# EAGLE board SparkFun RTK Facet - Cellular (EAGLE 9.6.2)
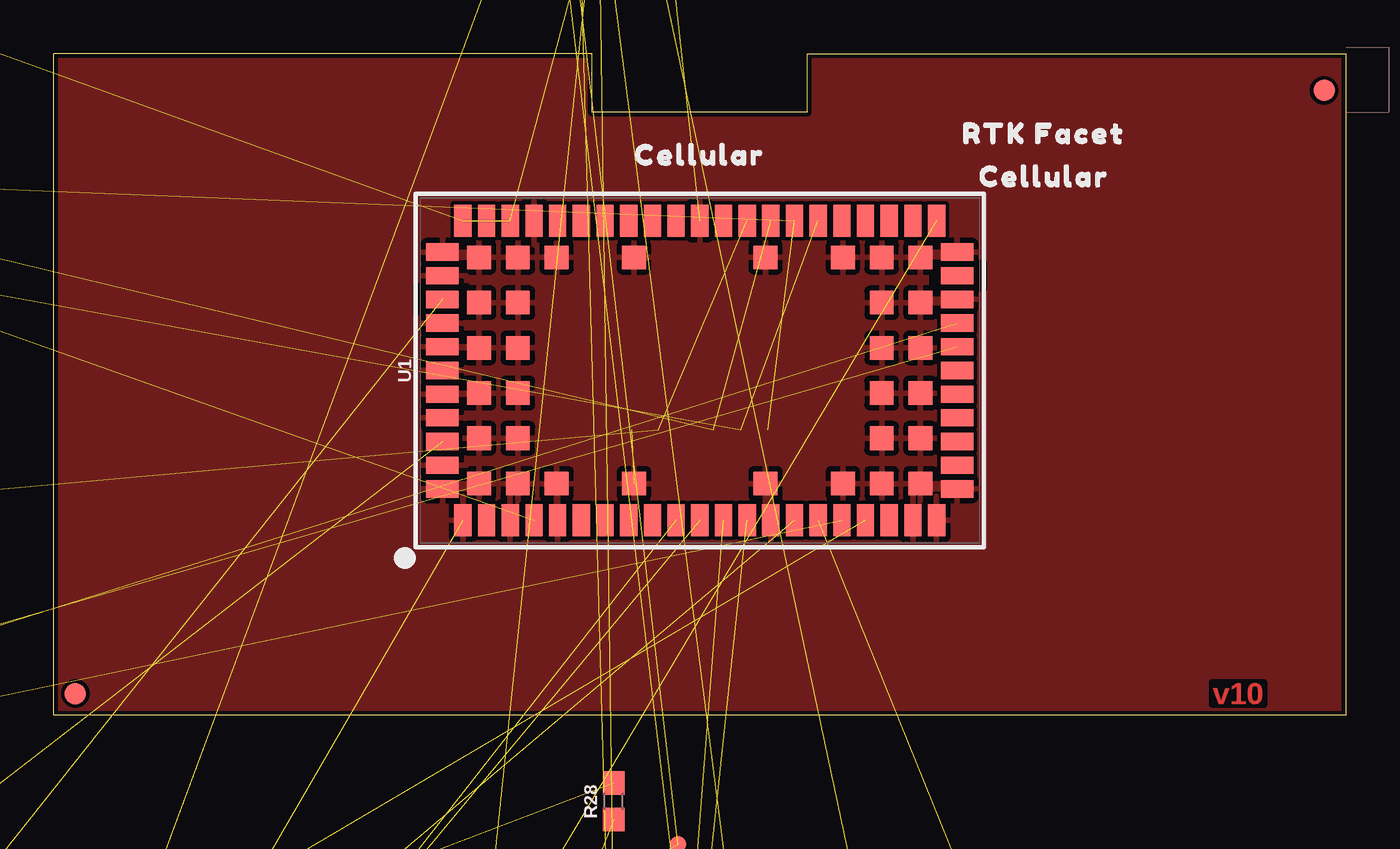
[diagram p0: board, top side]
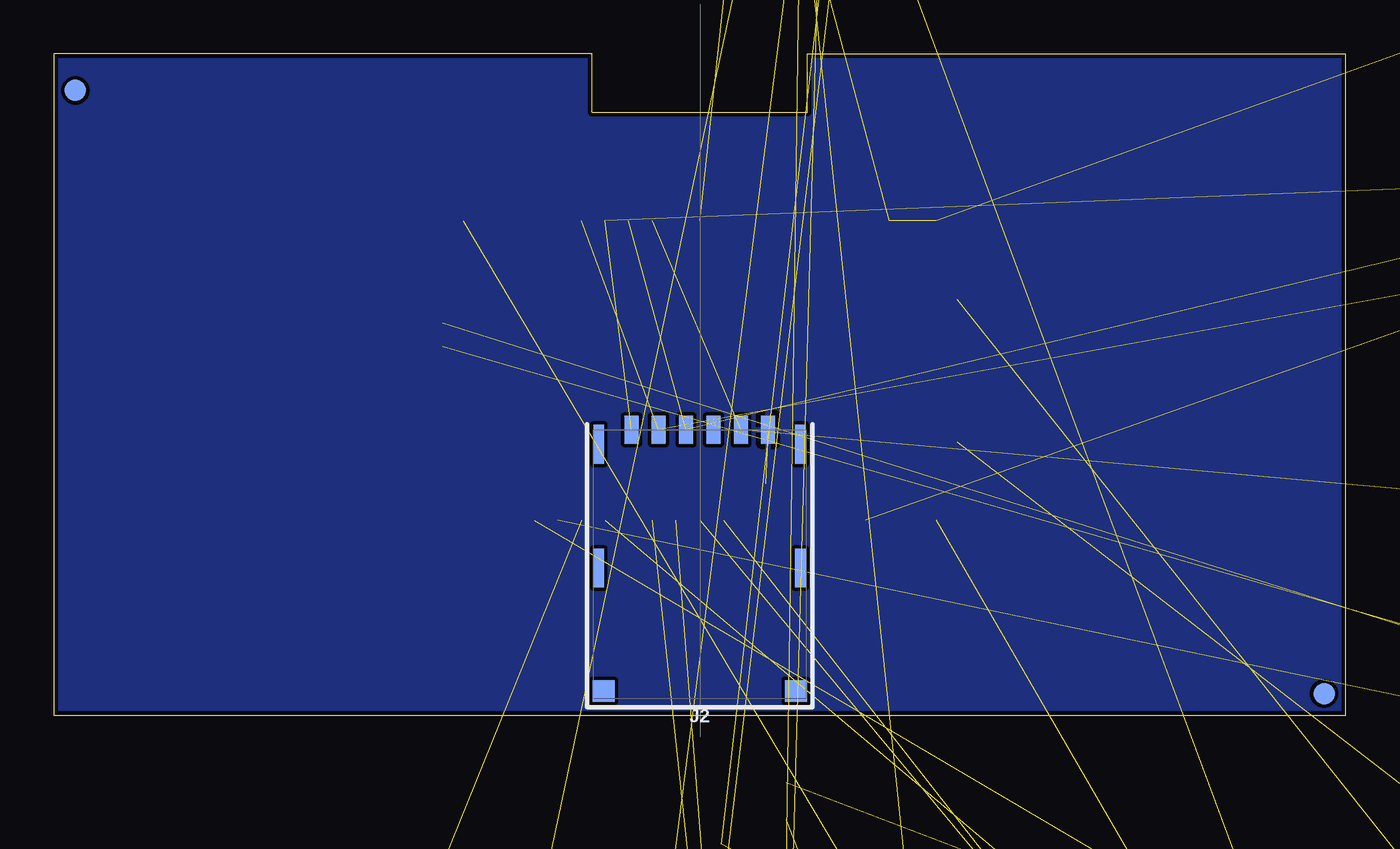
[diagram p1: board, bottom side, seen from below]

Size 60 x 30.7 mm. Coordinates in mm from the lower left corner, seen from the top.
Outline: 0,0 0,30.7 25,30.7 25,28 35,28 35,30.7 60,30.7 60,0 0,0
Copper layers (1*16): Top 0.035mm / dielectric 1.5mm / Bottom 0.035mm
Design rules "SparkFun-2-layer-TIGHT": minimum track width 7mil, minimum drill 15mil, track to track 7mil, track to pad 7mil, pad to pad 7mil, via to via 7mil, smd to smd 7mil, copper to edge 7mil, drill to drill 7mil, minimum pad ring 7mil, minimum via ring 7mil, stop-mask expansion 4mil, vias tented up to drill 25mil, thermal gap 10mil
Net classes: 0 default: width 0 mm, drill 0 mm; 1 power: width 0.178 mm
tKeepout: area 57,0 to 60,31; area 0,0 to 3,32
bKeepout: area 57,0 to 60,31; area 0,0 to 3,32

## Footprints (pad centres in the part's own frame; a part is rotated, then mirrored left to right if it is on the bottom)
0603 = smd 1.1 x 1: 1 -0.85,0; 2 0.85,0
0402 = smd 0.85 x 0.9: 1 -0.58,0; 2 0.58,0
SOT23-6L = smd 0.6 x 1.2: 1 -0.95,-1.15; 2 0,-1.15; 3 0.95,-1.15; 4 0.95,1.15; 5 0,1.15; 6 -0.95,1.15
LED-0603 = smd 1 x 1: A -0.877,0; C 0.877,0
FIDUCIAL-1X2 = smd 1 x 1: 1 0,0
SOP65P640X120-16N = smd 1.5 x 0.45: 1 -2.9,2.275; 2 -2.9,1.625; 3 -2.9,0.975; 4 -2.9,0.325; 5 -2.9,-0.325; 6 -2.9,-0.975; 7 -2.9,-1.625; 8 -2.9,-2.275; 9 2.9,-2.275; 10 2.9,-1.625; 11 2.9,-0.975; 12 2.9,-0.325; 13 2.9,0.325; 14 2.9,0.975; 15 2.9,1.625; 16 2.9,2.275
FPC_12_DOUBLESIDED_BACKFLIP = smd 0.3 x 0.8: 1 -2.75,1.35; 2 -2.25,1.35; 3 -1.75,1.35; 4 -1.25,1.35; 5 -0.75,1.35; 6 -0.25,1.35; 7 0.25,1.35; 8 0.75,1.35; 9 1.25,1.35; 10 1.75,1.35; 11 2.25,1.35; 12 2.75,1.35 | smd 0.4 x 0.8: MP1 -3.75,-1.15; MP2 3.75,-1.15
NANO_SIM_WURTH_693043020611 = smd 0.65 x 1.3: C1 1.905,6.25; C2 -0.635,6.25; C3 -1.905,6.25; C5 3.175,6.25; C6 0.635,6.25; C7 -3.175,6.25 | smd 0.48 x 1.8: MNT1 -4.69,5.58; MNT2 4.66,5.58; MNT3 -4.69,-0.17; MNT4 4.66,-0.17 | smd 1.03 x 1: MNT5 -4.465,-5.89; MNT6 4.465,-5.89
U.FL = smd 2.2 x 0.85: 1 0,1.375; 2 0,-1.375 | smd 1.05 x 1: FEED 1.525,0; NC -1.525,0
1X05_NO_SILK = drill 1.016 pad 1.88: 1 0,0; 2 2.54,0; 3 5.08,0; 4 7.62,0; 5 10.16,0
1X04_NO_SILK = drill 1.016 pad 1.88: 1 0,0; 2 2.54,0; 3 5.08,0; 4 7.62,0
SMT-JUMPER_3_1-NC_TRACE_SILK = smd 0.66 x 1.27: 1 -1.041,0; 2 0,0; 3 1.041,0
0402_COILCRAFT = smd 0.356 x 0.66: P$1 -0.432,0; P$2 0.432,0
SOT323 = smd 0.7 x 0.7: 1 -0.65,-0.925; 2 0.65,-0.925; 3 0,0.925
SOT-416FL = smd 0.46 x 0.65: 1 -0.5,-1.1; 2 0.5,-1.1; 3 0,0.05
PAD.03X.03 = smd 0.762 x 0.762: P$1 0,0
SARA-LGA = smd 0.8 x 1.5: 1 -11,-6.95; 2 -9.9,-6.95; 3 -8.8,-6.95; 4 -7.7,-6.95; 5 -6.6,-6.95; 6 -5.5,-6.95; 7 -4.4,-6.95; 8 -3.3,-6.95; 9 -2.2,-6.95; 10 -1.1,-6.95; 11 0,-6.95; 12 1.1,-6.95; 13 2.2,-6.95; 14 3.3,-6.95; 15 4.4,-6.95; 16 5.5,-6.95; 17 6.6,-6.95; 18 7.7,-6.95; 19 8.8,-6.95; 20 9.9,-6.95; 21 11,-6.95; 33 11,6.95; 34 9.9,6.95; 35 8.8,6.95; 36 7.7,6.95; 37 6.6,6.95; 38 5.5,6.95; 39 4.4,6.95; 40 3.3,6.95; 41 2.2,6.95; 42 1.1,6.95; 43 0,6.95; 44 -1.1,6.95; 45 -2.2,6.95; 46 -3.3,6.95; 47 -4.4,6.95; 48 -5.5,6.95; 49 -6.6,6.95; 50 -7.7,6.95; 51 -8.8,6.95; 52 -9.9,6.95; 53 -11,6.95 | smd 1.5 x 0.8: 22 11.95,-5.5; 23 11.95,-4.4; 24 11.95,-3.3; 25 11.95,-2.2; 26 11.95,-1.1; 27 11.95,0; 28 11.95,1.1; 29 11.95,2.2; 30 11.95,3.3; 31 11.95,4.4; 32 11.95,5.5; 54 -11.95,5.5; 55 -11.95,4.4; 56 -11.95,3.3; 57 -11.95,2.2; 58 -11.95,1.1; 59 -11.95,0; 60 -11.95,-1.1; 61 -11.95,-2.2; 62 -11.95,-3.3; 63 -11.95,-4.4; 64 -11.95,-5.5 | smd 1.1 x 1.1: 65 -10.25,-5.25; 66 -10.25,-3.15; 67 -10.25,-1.05; 68 -10.25,1.05; 69 -10.25,3.15; 70 -10.25,5.25; 71 -8.45,-5.25; 72 -8.45,-3.15; 73 -8.45,-1.05; 74 -8.45,1.05; 75 -8.45,3.15; 76 -8.45,5.25; 77 -6.65,-5.25; 78 -6.65,5.25; 79 -3.05,-5.25; 80 -3.05,5.25; 81 3.05,-5.25; 82 3.05,5.25; 83 6.65,-5.25; 84 6.65,5.25; 85 8.45,-5.25; 86 8.45,-3.15; 87 8.45,-1.05; 88 8.45,1.05; 89 8.45,3.15; 90 8.45,5.25; 91 10.25,-5.25; 92 10.25,-3.15; 93 10.25,-1.05; 94 10.25,1.05; 95 10.25,3.15; 96 10.25,5.25
SOT353 = smd 0.42 x 0.7: 1 -0.65,-0.95; 2 0,-0.95; 3 0.65,-0.95; 4 0.65,0.95; 5 -0.65,0.95

## Placement (x,y rotation side)
C7  47pF  [0603]  -32,9 0 top  (outside the outline)
C8  47pF  [0603]  -28,9 0 top  (outside the outline)
C10  47pF  [0603]  -24,9 0 top  (outside the outline)
C11  47pF  [0603]  -20,9 0 top  (outside the outline)
C12  0.1uF  [0603]  -32,5 0 top  (outside the outline)
C14  0.1uF  [0603]  -20,33 0 top  (outside the outline)
C15  68pF  [0603]  -16,33 0 top  (outside the outline)
C16  10uF  [0603]  -12,33 0 top  (outside the outline)
C18  33pF  [0402]  -14,-15 0 top  (outside the outline)
C19  27pF  [0402]  -11,-15 0 top  (outside the outline)
C22  0.1uF  [0603]  26,-32 90 top  (outside the outline)
C24  15pF  [0603]  -8,33 0 top  (outside the outline)
D8  DT1042-04SO-7  [SOT23-6L]  -20,24 0 top  (outside the outline)
D10  PESD0402  [0402]  -5,-7 0 top  (outside the outline)
D13  BLUE  [LED-0603]  61,-32 90 top  (outside the outline)
D14  WHITE  [LED-0603]  57,-20 90 top  (outside the outline)
FID1  FIDUCIAL1X2  [FIDUCIAL-1X2]  1,1 0 bottom
FID2  FIDUCIAL1X2  [FIDUCIAL-1X2]  59,29 0 bottom
FID3  FIDUCIAL1X2  [FIDUCIAL-1X2]  59,29 0 top
FID4  FIDUCIAL1X2  [FIDUCIAL-1X2]  1,1 0 top
FRAME1  FRAME-LETTER  [CREATIVE_COMMONS]  52.57,-29.5 0 bottom  (outside the outline)
FRAME2  FRAME-LETTERNO_PACKAGE  [DUMMY]  -7,-33 90 top  (outside the outline)
IC1  SN74AVC4T774PW  [SOP65P640X120-16N]  -1,-25 90 top  (outside the outline)
J1  [FPC_12_DOUBLESIDED_BACKFLIP]  25,45 180 top  (outside the outline)
J2  NANO_SIM  [NANO_SIM_WURTH_693043020611]  30,7 0 bottom
J3  U.FL  [U.FL]  -16,-20 0 top  (outside the outline)
J6  DIAG  [1X05_NO_SILK]  -32,1 0 top  (outside the outline)
J18  SARA_USB  [1X04_NO_SILK]  -31,-4 0 top  (outside the outline)
JP19  JUMPER-SMT_3_1-NC_TRACE_SILK  [SMT-JUMPER_3_1-NC_TRACE_SILK]  22,-10 90 top  (outside the outline)
L1  DNP  [0402_COILCRAFT]  -8,-14 0 top  (outside the outline)
L2  68nH  [0402_COILCRAFT]  -5,-14 0 top  (outside the outline)
LOGO3  OSHW-LOGOMINI  [OSHW-LOGO-MINI]  -10,6 0 top  (outside the outline)
LOGO5  SFE_LOGO_NAME_FLAME.1_INCH  [SFE_LOGO_NAME_FLAME_.1]  -13.9,12.9 0 top  (outside the outline)
Q2  310mA/60V/1.6Ω  [SOT323]  8,-14 90 top  (outside the outline)
Q3  310mA/60V/1.6Ω  [SOT323]  42,-26 90 top  (outside the outline)
Q4  310mA/60V/1.6Ω  [SOT323]  8,-9 90 top  (outside the outline)
Q5  20V/0.2A/8MHz/1.2Ω/1Vth  [SOT-416FL]  16,-21 90 top  (outside the outline)
Q7  310mA/60V/1.6Ω  [SOT323]  42,-21 90 top  (outside the outline)
R18  100k  [0603]  26,-24 90 top  (outside the outline)
R19  100k  [0603]  26,-20 90 top  (outside the outline)
R23  10k  [0603]  -17,-15 0 top  (outside the outline)
R27  1k  [0603]  26,-8 90 top  (outside the outline)
R28  1k  [0603]  26,-4 90 top  (outside the outline)
R29  2.2k  [0603]  30,-32 90 top  (outside the outline)
R30  2.2k  [0603]  30,-28 90 top  (outside the outline)
R31  0  [0603]  -32,28 0 top  (outside the outline)
R34  1k  [0603]  48,-21 90 top  (outside the outline)
R35  470  [0603]  53,-32 90 top  (outside the outline)
R39  100k  [0603]  53,-24 90 top  (outside the outline)
R42  1k  [0603]  53,-20 90 top  (outside the outline)
R43  1k  [0603]  57,-32 90 top  (outside the outline)
R44  100k  [0603]  57,-28 90 top  (outside the outline)
TP1  TEST-POINT3  [PAD.03X.03]  29,-21 90 top  (outside the outline)
TP2  TEST-POINT3  [PAD.03X.03]  29,-18 90 top  (outside the outline)
TP3  TEST-POINT3  [PAD.03X.03]  29,-15 90 top  (outside the outline)
TP4  TEST-POINT3  [PAD.03X.03]  29,-12 90 top  (outside the outline)
TP5  TEST-POINT3  [PAD.03X.03]  29,-9 90 top  (outside the outline)
TP6  TEST-POINT3  [PAD.03X.03]  29,-6 90 top  (outside the outline)
TP7  TEST-POINT3  [PAD.03X.03]  33,-33 90 top  (outside the outline)
TP8  TEST-POINT3  [PAD.03X.03]  33,-30 90 top  (outside the outline)
TP12  TEST-POINT3  [PAD.03X.03]  33,-21 90 top  (outside the outline)
TP13  TEST-POINT3  [PAD.03X.03]  60,-29 90 top  (outside the outline)
U1  SARA-R510M8S  [SARA-LGA]  30,16 0 top
U8  74HC1G04  [SOT353]  17,-31 90 top  (outside the outline)
U$2  [CELLULAR1]  46,25 0 top
U$13  [CELLULAR0]  30,26 0 top
U$14  [RTK_FACET0]  46,27 0 top
U$130  [NANO0]  72.19,7.54 0 top  (outside the outline)
U$131  [SIM0]  72.19,6.27 0 top  (outside the outline)

## Library data of the parts
C7 C8 C10 C11 = SparkFun-Capacitors; PROD_ID: CAP-08913
C12 C14 = SparkFun-Capacitors; PROD_ID: CAP-08604
C15 = SparkFun-Capacitors; PROD_ID: CAP-14092
C16 = SparkFun-Capacitors; PROD_ID: CAP-11015
C18 = New_Parts; DIGIKEY_PART: 490-5936-1-ND; MANUFACTURER: Murata; MANU_PART: GRM1555C1H330JA; PROD_ID: CAP-15358
C19 = New_Parts; DIGIKEY_PART: 490-11384-1-ND; MANUFACTURER: Murata; MANU_PART: GRM1555C1H270JA; PROD_ID: CAP-15357
C22 = SparkFun-Capacitors; PROD_ID: CAP-00810
C24 = SparkFun-Capacitors; PROD_ID: CAP-07881
D8 = ublox; PROD_ID: DIO-14095
D10 = New_Parts; DIGIKEY_PART: PESD0402-140CT-ND; MOUSE_PART: 650-PESD0402-140; PROD_ID: DIO-15359
D13 = SparkFun-LED; PROD_ID: DIO-08575
D14 = SparkFun-LED; PROD_ID: DIO-09004
FID1-FID4 FRAME1 LOGO3 LOGO5 = SparkFun-Aesthetics
FRAME2 = SparkFun-Aesthetics; DESIGNER: Nobody; VERSION: v01
IC1 = New_Parts; ARROW_PART_NUMBER: SN74AVC4T774PW; ARROW_PRICE-STOCK: https://www.arrow.com/en/products/sn74avc4t774pw/texas-instruments; DESCRIPTION: Texas Instruments,SN74AVC4T774PW,IC, Texas Instruments SN74AVC4T774PW, Dual, Bus Transceiver, 4-Bit Non-Inverting 3-State, 1.2 3.6 V, 16-Pin TSSOP; MANUFACTURER_NAME: Texas Instruments; MANUFACTURER_PART_NUMBER: SN74AVC4T774PW; MOUSER_PART_NUMBER: 595-SN74AVC4T774PW; MOUSER_PRICE-STOCK: https://www.mouser.co.uk/ProductDetail/Texas-Instruments/SN74AVC4T774PW?qs=WxL8HmPi5r44hV1AE7gRvg%3D%3D; PROD_ID: IC-15360
J1 = RTK Facet; PROD_ID: CONN-15766
J2 = ublox; PROD_ID: CONN-14097
J3 = SparkFun-Connectors; PROD_ID: CONN-09193; SF_ID: WRL-09144
J6 TP1-TP8 TP12 TP13 = SparkFun-Connectors
J18 = SparkFun-Connectors; PROD_ID: CONN-09696
JP19 = SparkFun-Jumpers
L1 = New_Parts
L2 = New_Parts; DIGIKEY_PART: 490-2633-1-ND; MOUSER_PART: 81-LQG15HS68NJ02D; PROD_ID: NDUC-15356
Q2-Q4 Q7 = SparkFun-DiscreteSemi; PROD_ID: TRANS-11151
Q5 = SparkFun-DiscreteSemi; PROD_ID: TRANS-14399
R18 R19 R39 R44 = SparkFun-Resistors; PROD_ID: RES-07828
R23 = SparkFun-Resistors; PROD_ID: RES-00824
R27 R28 R34 R42 R43 = SparkFun-Resistors; PROD_ID: RES-07856
R29 R30 = SparkFun-Resistors; PROD_ID: RES-08272
R31 = SparkFun-Resistors; PROD_ID: RES-08609
R35 = SparkFun-Resistors; PROD_ID: RES-07869
U1 = SARA_R5; PROD_ID: IC-15573
U8 = SparkFun-IC-Logic; PROD_ID: COMP-08268
U$2 U$13 U$14 U$130 U$131 = output

## Nets
1.8V: J6.4
3.3V [power]: C14.1 C15.1 C16.1 C24.1 D13.A D14.A IC1.15 J1.3 J6.2 R30.2 R39.2 R44.2 U1.51 U1.52 U1.53 U8.5
GND: C7.2 C8.2 C10.1 C11.1 C12.1 C14.2 C15.2 C16.2 C19.2 C22.2 C24.2 D8.2 D8.5 D10.2 IC1.2 IC1.8 IC1.9 IC1.10 J1.1 J1.2 J2.C5 J3.1 J3.2 J6.5 J18.4 L1.P$2 Q2.2 Q3.2 Q4.2 Q7.2 R18.2 R19.1 U1.1 U1.3 U1.5 U1.14 U1.20 U1.21 U1.22 U1.30 U1.32 U1.43 U1.50 U1.54 U1.55 U1.57 U1.58 U1.59 U1.60 U1.61 U1.63 U1.64 U1.65 U1.66 U1.67 U1.68 U1.69 U1.70 U1.71 U1.72 U1.73 U1.74 U1.75 U1.76 U1.77 U1.78 U1.79 U1.80 U1.81 U1.82 U1.83 U1.84 U1.85 U1.86 U1.87 U1.88 U1.89 U1.90 U1.91 U1.92 U1.93 U1.94 U1.95 U1.96 U8.3
LTE_!RESET!: J1.5 U8.2
LTE_CTS: IC1.12 J1.9 TP7.P$1
LTE_INT: J1.7 Q5.3 R30.1 TP12.P$1
LTE_NI: J1.4 Q3.3 R35.1 R39.1
LTE_PWR_ON: J1.6 R18.1 R27.1
LTE_RTS: IC1.11 J1.8 R19.2 TP8.P$1
LTE_RX: IC1.14 J1.11 TP5.P$1
LTE_TX: IC1.13 J1.10 TP6.P$1
N$15: C18.2 J3.FEED L2.P$2
N$16: C19.1 D10.1 L2.P$1 R23.2
N$26: Q2.1 R27.2
N$27: Q4.1 R28.2
N$28: R28.1 U8.4
N$31: R31.2 U1.4
N$35: Q3.1 R34.2
N$37: D13.C R35.2
N$43: JP19.2 Q5.2 R29.1
N$47: Q7.1 R42.2
N$49: D14.C R43.2
SARA_!ON!: Q7.3 R43.1 R44.1 TP13.P$1
SARA_!RESET!: Q4.3 U1.18
SARA_ANT: C18.1 L1.P$1 U1.56
SARA_ANT_DET: R23.1 U1.62
SARA_CTS: IC1.5 TP3.P$1 U1.11
SARA_EXT_INT: JP19.3 U1.33
SARA_GPIO3: JP19.1
SARA_NI: R34.1 U1.16
SARA_PWR_ON: Q2.3 U1.15
SARA_RTS: IC1.6 TP4.P$1 U1.10
SARA_RXD: IC1.3 TP1.P$1 U1.13
SARA_TP: U1.19
SARA_TXD: IC1.4 TP2.P$1 U1.12
SARA_USB_D+: J18.2 U1.29
SARA_USB_D-: J18.1 U1.28
SARA_VUSB_DET: J18.3 U1.17
SIM_CLK: C8.1 D8.1 J2.C3 U1.38
SIM_IO: C10.2 D8.6 J2.C7 U1.39
SIM_RST: C7.1 D8.4 J2.C2 U1.40
V_USB: J1.12
VCCIO: C22.1 IC1.1 IC1.7 IC1.16 J6.3 Q5.1 R29.2 R31.1 R42.1
VIN: J6.1
VSIM: C11.2 C12.2 D8.3 J2.C1 U1.41

## Tracks (layer width: path | path; a pad name or v marks a point on that pad's centre or on a via)
3.3V  (15 unrouted)
GND  (33 unrouted)
  pour Top (isolate 0.152): 0,0 0,30.7 60,30.7 60,0
  pour Bottom (isolate 0.152): 0,0 0,30.7 60,30.7 60,0
LTE_!RESET!  (1 unrouted)
LTE_CTS  (2 unrouted)
LTE_INT  (3 unrouted)
LTE_NI  (3 unrouted)
LTE_PWR_ON  (2 unrouted)
LTE_RTS  (3 unrouted)
LTE_RX  (2 unrouted)
LTE_TX  (2 unrouted)
N$15  (2 unrouted)
N$16  (3 unrouted)
N$26  (1 unrouted)
N$27  (1 unrouted)
N$28  (1 unrouted)
N$31  (1 unrouted)
N$35  (1 unrouted)
N$37  (1 unrouted)
N$43  (2 unrouted)
N$47  (1 unrouted)
N$49  (1 unrouted)
SARA_!ON!  (3 unrouted)
SARA_!RESET!  (1 unrouted)
SARA_ANT  (2 unrouted)
SARA_ANT_DET  (1 unrouted)
SARA_CTS  (2 unrouted)
SARA_EXT_INT  (1 unrouted)
SARA_NI  (1 unrouted)
SARA_PWR_ON  (1 unrouted)
SARA_RTS  (2 unrouted)
SARA_RXD  (2 unrouted)
SARA_TXD  (2 unrouted)
SARA_USB_D+  (1 unrouted)
SARA_USB_D-  (1 unrouted)
SARA_VUSB_DET  (1 unrouted)
SIM_CLK  (3 unrouted)
SIM_IO  (3 unrouted)
SIM_RST  (3 unrouted)
VCCIO  (8 unrouted)
VSIM  (4 unrouted)

## Text on the board
Top: v10
tDocu: FPC stiffener is 3mm